# Altium PCB PCB_skinBot_tether_wire_board_v1.PcbDoc
Units mil, origin at the board's own origin, x right, y up, seen from the top; angles counter-clockwise.
Board outline 1154.89 x 1486.81 mil, 2 copper layers (Top Layer, Bottom Layer); 8 components, 10 nets, 39 pads, 25 vias.
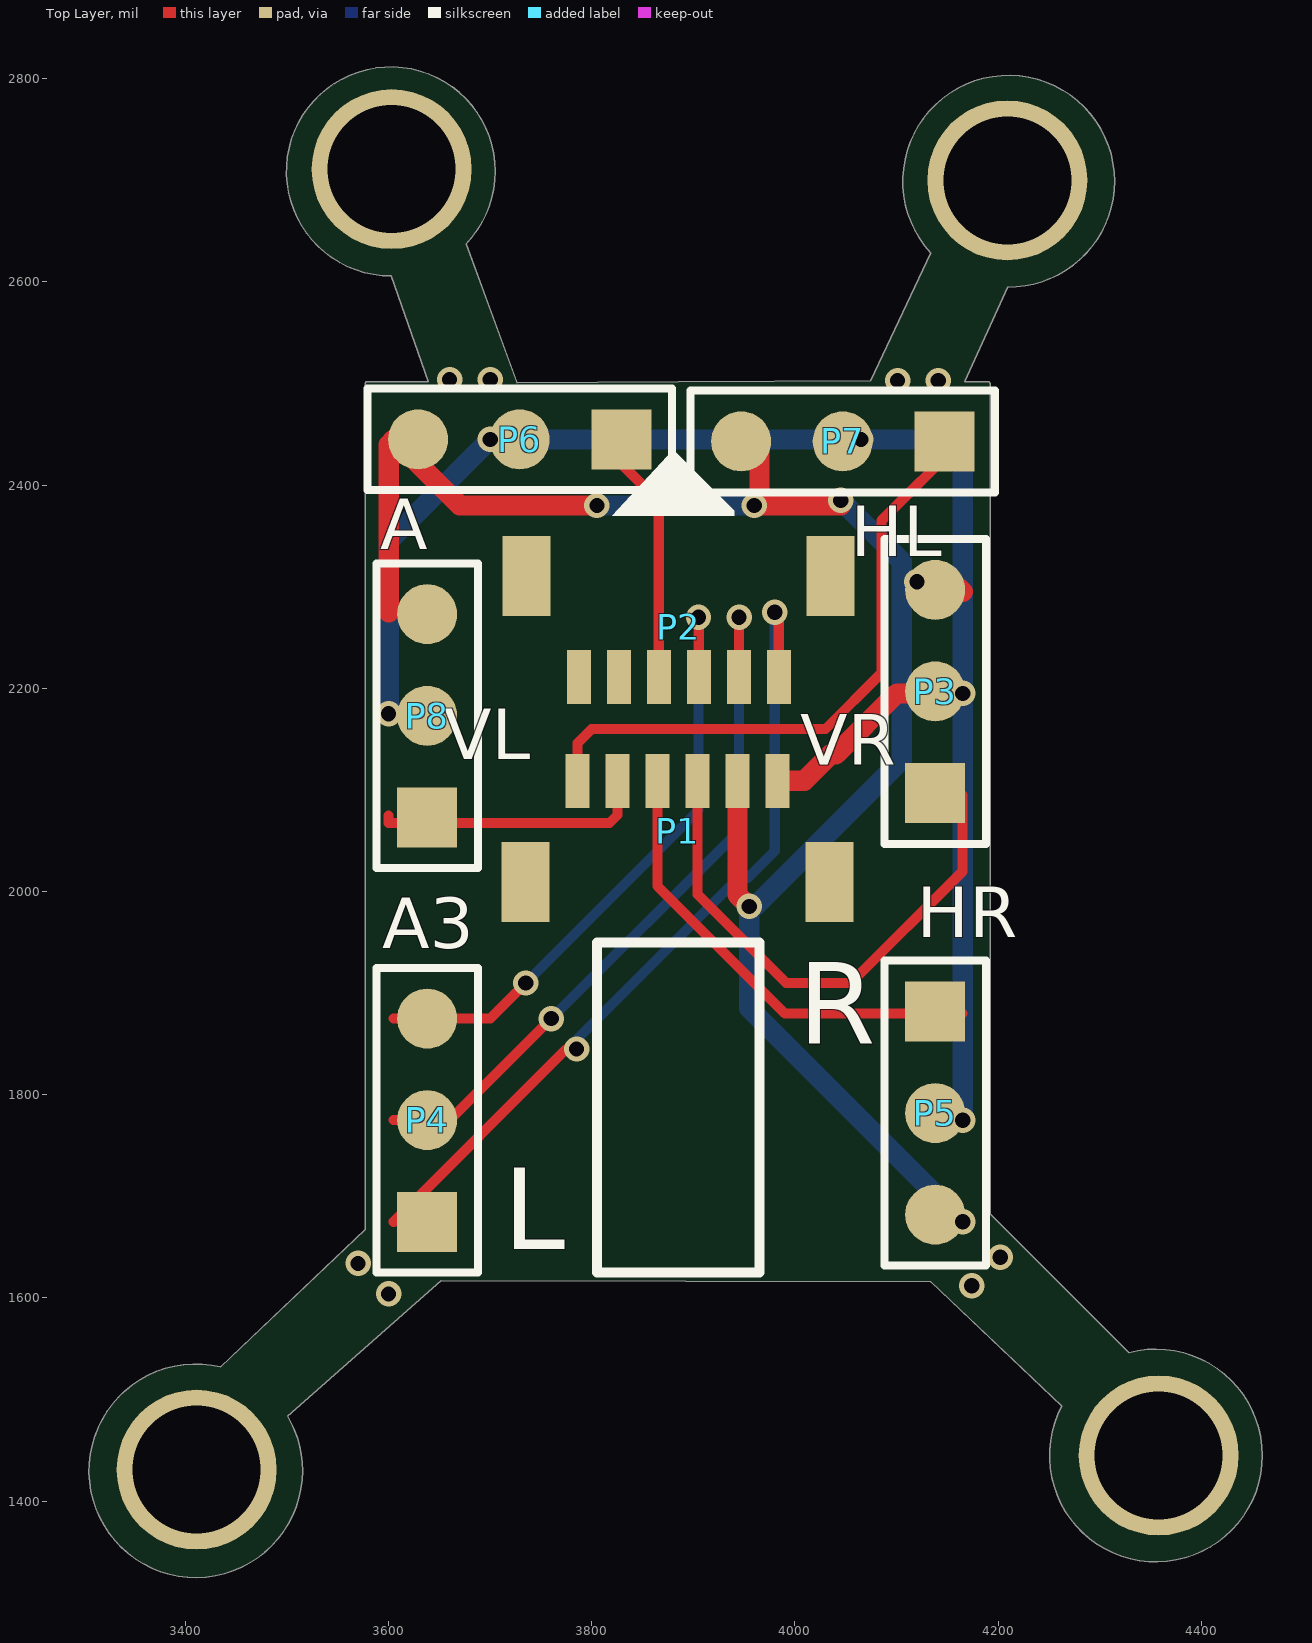
[diagram p0: Top Layer view]
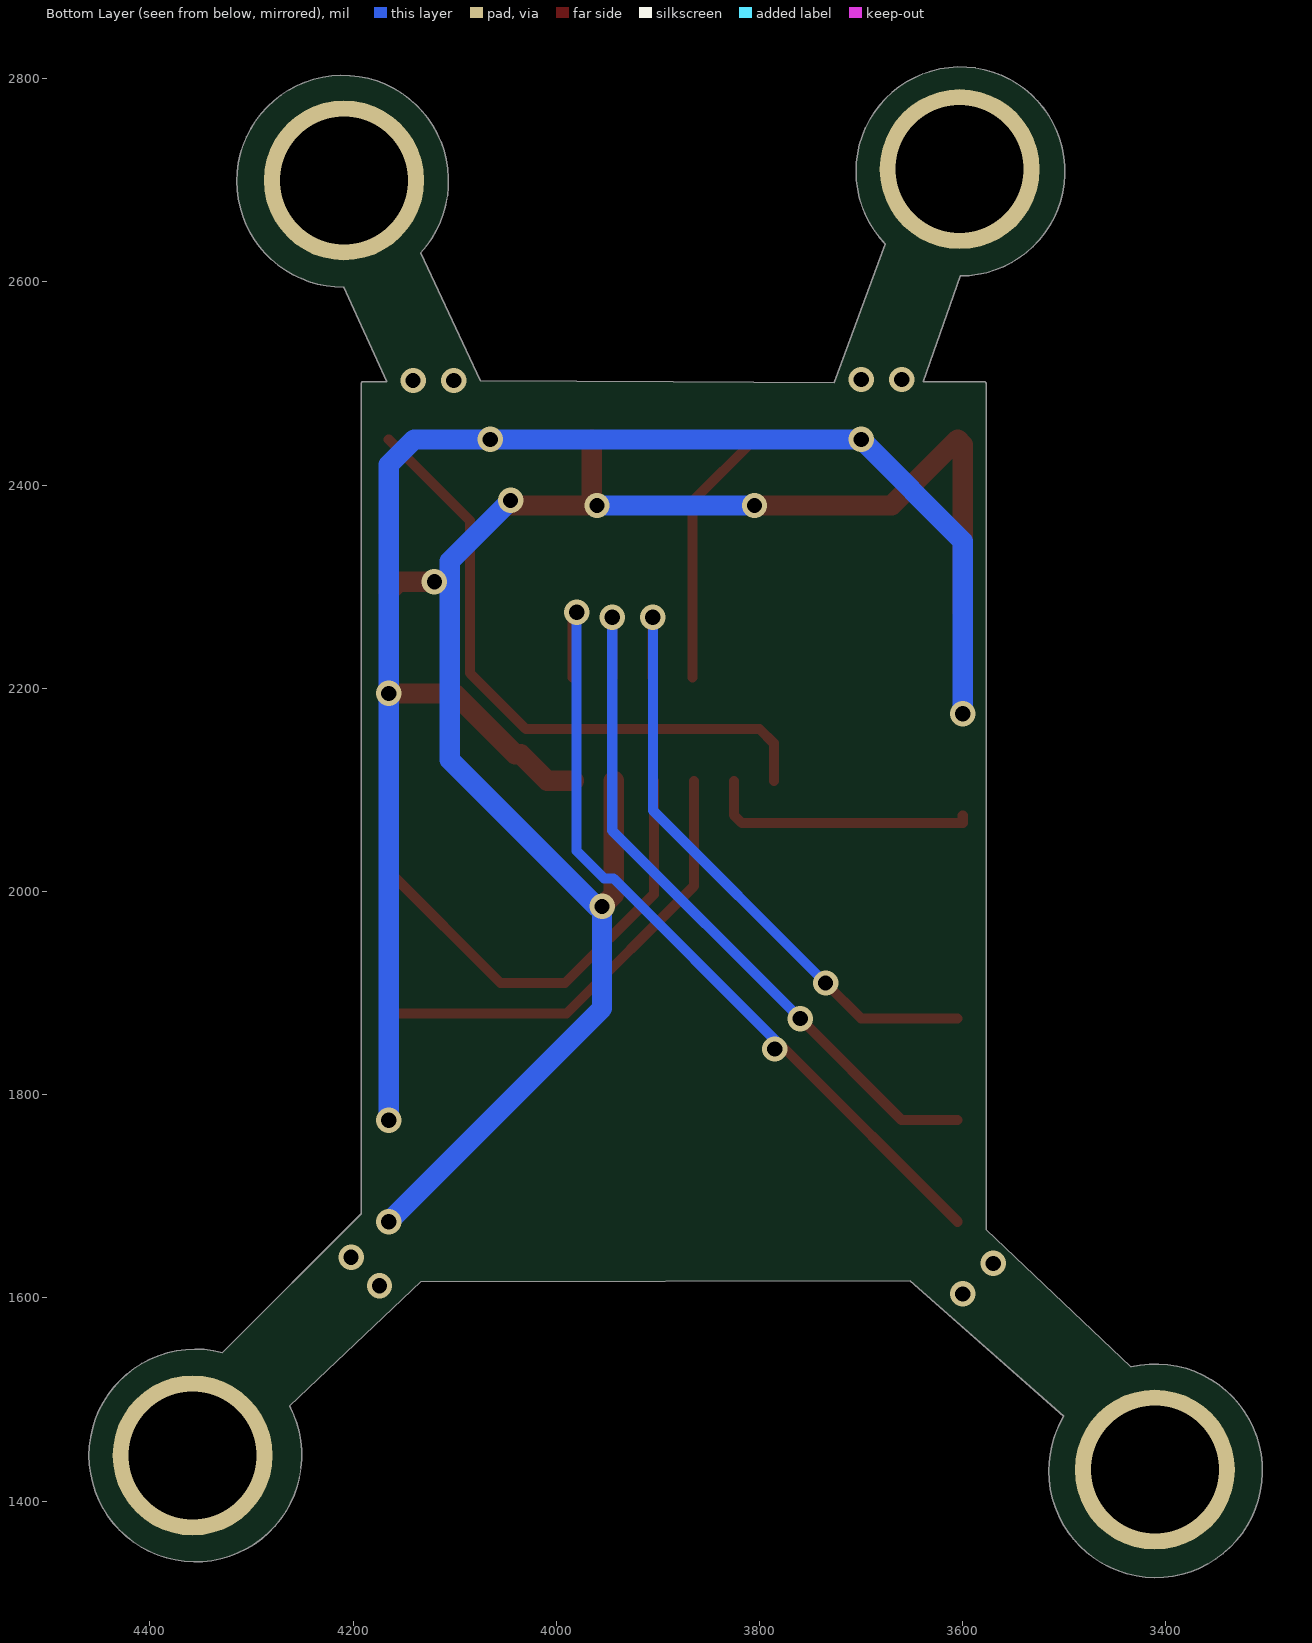
[diagram p1: Bottom Layer view, seen from below]

## Layer stack, top to bottom
Top Solder: solder mask 0.4, Solder Resist, Dk 3.5
Top Layer: signal copper 1.4
Dielectric 1: dielectric 12.6, FR-4, Dk 4.8
Bottom Layer: signal copper 1.4
Bottom Solder: solder mask 0.4, Solder Resist, Dk 3.5

## Board outline
3515.31,1429.9 ccw(c3410.2,1429.9) 3500.56,1483.61 3651.75,1616.86 4133.34,1616.15 4262.54,1493.6 ccw(c4355.27,1444.95) 4459.99,1444.95 ccw(c4355.27,1444.95) 4328.59,1546.21 4191.98,1682.82 4191.98,2500 ccw(c4190,2500) 4190,2501.98 4167.08,2501.98 4209.27,2595 ccw(c4210.32,2699.21) 4314.53,2699.21 ccw(c4210.32,2699.21) 4133.63,2628.63 4074.74,2502.98 3884.99,2501.98 ccw(c3885,2500) 3884.99,2501.98 3726.38,2500.99 3676.29,2637.51 ccw(c3602.21,2708.84) 3705.05,2708.84 ccw(c3602.21,2708.84) 3602.6,2606 3638.9,2501.98 3579,2501.98 ccw(c3579,2500) 3577.02,2500 3577.02,1667.34 3434.42,1532.18 ccw(c3410.2,1429.9)

## Design rules (kind name [scope] priority, off if disabled: settings)
Clearance [All] p1: gap=10 ignorepadtopadclearanceinfootprint=FALSE except(0: Arc-Hole Track-Hole SMDPad-Hole THPad-Hole Via-Hole Fill-Hole Poly-Hole Region-Hole Text-Hole)
PolygonConnect [All] p1: connectstyle=Relief reliefconductorwidth=10 reliefentries=4 polygonreliefangle="90 Angle" airgapwidth=10
RoutingVias [All] p1: holewidth=15 width=25 viastyle="Through Hole" minholewidth=15 minwidth=25 maxholewidth=28 maxwidth=50
SolderMaskExpansion [All] p1: expansion=4
Width [All] p1: maxlimit=30 minlimit=5 preferedwidth=10
30 further rules are at their usual default settings.

## Components (designator, comment, footprint, x,y, rotation, side; value= is the part's Value field where it differs from the comment)
P1 "JST SH 6" "JST SH 6 TOP ENTRY 1MM" 3900,2075 r0 top
P2 "JST SH 6" "JST SH 6 TOP ENTRY 1MM" 3870,2245 r180 top
P3 "Header 3" HDR1X3 4138,2097 r90 top
P4 "Header 3" HDR1X3 3638,1675 r90 top
P5 "Header 3" HDR1X3 4138,1882 r270 top
P6 "Header 3" HDR1X3 3829,2445 r180 top
P7 "Header 3" HDR1X3 4147,2443 r180 top
P8 "Header 3" HDR1X3 3638,2073 r90 top

## Footprints (in the part's own frame and the unit in brackets; to place one, negate y for a bottom-side part, rotate by r counter-clockwise, add the part's x,y. Pads: shape width x height; smd on the part's side, far side on the other; paste and mask are expansions set on the pad)
HDR1X3 [mm] "Connector; Header; 3 Position"
  rect 1.5x1.5 smd: 1(0,0)
  round 1.5 smd: 2(2.54,0) 3(5.08,0)
  silkscreen extent -1.27,-1.27 6.35,1.27
"JST SH 6 TOP ENTRY 1MM" [mm] "1 mm pitch"
  rect 0.6x1.35 smd: 1(-2.898,0.863) 2(-1.898,0.863) 3(-0.898,0.863) 4(0.102,0.863) 5(1.102,0.863) 6(2.102,0.863)
  rect 1.2x2 smd: NC(-4.195,-1.663) NC(3.405,-1.663)
  body extent -4.41,-2.53 3.59,1.07, height 4.25

## Part data
P1 P2: sparkfun part number=PRT-10210
P3 P4 P5 P6 P7 P8: "Header, 3-Pin", LatestRevisionDate=17-Jul-2002, LatestRevisionNote="Re-released for DXP Platform.", Publisher="Altium Limited"

## Free pads (board coordinates)
  rect 78.74x196.85 on Mech16 rot 155: 15(4166,2614)
  round 157.48 hole 125.98: 16(3411,1431) 16(3603,2711) 16(4209,2700) 16(4358,1445)

## Via types
v1: diameter 25, hole 15, Top Layer to Bottom Layer, tented both sides, 25 vias

## Nets (pads, with @x,y where several pads share a name; then routed paths per layer and width w, separated by ;. In a path a pad name is that pad's centre, name@x,y a point inside that pad or via, vN(x,y) a via of type N, cw(c..) or ccw(c..) an arc to the next point about the centre after c; other vN are vias at no path point)
AUX1: P2.4 P6.1 | length 259.3
  Top Layer w10: P6.1@3805,2445 3865.97,2384.03 P2.4
AUX2: P2.1 P4.1 | length 832.3
  Top Layer w10: 3605,1675 3775,1845 v1(3785,1845) ; v1(3980,2275) 3984.08,2270.92 P2.1
  Bottom Layer w10: v1(3785,1845) 3785,1854.25 3943.61,2012.86 3952.86,2012.86 3980,2040 v1(3980,2275)
AUX3: P2.2 P4.2 | length 727.2
  Top Layer w10: 3605,1775 3660,1775 v1(3760,1875) ; P2.2 3945,2211.29 v1(3945,2270)
  Bottom Layer w10: v1(3760,1875) 3945,2060 v1(3945,2270)
AUX4: P2.3 P4.3 | length 634.1
  Top Layer w10: 3605,1875 3700,1875 v1(3735,1910) ; v1(3905,2270) 3905.34,2269.66 P2.3
  Bottom Layer w10: v1(3735,1910) 3905,2080 v1(3905,2270)
GND: P1.5 P3.3 P5.3 P6.3 P7.3 P8.3 | length 1783
  Top Layer w10: 3600,2275 3605,2280
  Top Layer w20: 3600,2275 3600,2440 3605,2445 3670,2380 v1(3805,2380) ; P1.5 3943.4,1996.96 v1(3955,1985.36) ; P7.3@3965,2445 3965,2385 v1(3960,2380) 4045,2380 v1(4045,2385) ; v1(4120,2305) 4155,2305 P3.3@4165,2295
  Bottom Layer w20: v1(3805,2380) v1(3960,2380) ; v1(4045,2385) 4105,2325 4105,2129.64 3960.71,1985.36 v1(3955,1985.36) 3955,1885 v1(4165,1675)
H_L: P1.1 P7.1 | length 627.8
  Top Layer w10: P1.1 3785.92,2145.92 3800,2160 4030,2160 4085,2215 4085,2365 P7.1@4165,2445
H_R: P1.3 P5.1 | length 455.9
  Top Layer w10: P1.3 3864.66,2005.34 3990,1880 P5.1@4165,1880
V_L: P1.2 P8.1 | length 269.8
  Top Layer w10: 3600,2075 3600,2067.42 3817.42,2067.42 3825.29,2075.29 P1.2
V_R: P1.4 P3.1 | length 529.3
  Top Layer w10: P1.4 3904.03,1997.44 3991.46,1910 4055,1910 4165,2020 P3.1@4165,2095
VCC: P1.6 P3.2 P5.2 P6.2 P7.2 P8.2 | length 1649.6
  Top Layer w20: P1.6 4008.99,2108.99 4035,2135 4040.36,2135 4100.36,2195 v1(4165,2195)
  Bottom Layer w20: v1(3600,2175) 3600,2345 v1(3700,2445) v1(4065,2445) 4140,2445 4165,2420 v1(4165,2195) v1(4165,1775)
pads on no net: P1.NC P2.5 P2.6 P2.NC
copper on no net:
  other v1: 3600,1604 4174,1612 3570,1634 4202,1640 4101,2503 4141,2503 3660,2504 3700,2504

## Silkscreen, mask and mechanical layers (free items; w line width, h text height)
Top Overlay:
  region: 3820,2370 3940,2370 3940,2375 3880,2435
  lines w10: 3805,1625 3965,1625 3965,1950 3805,1950 3805,1625
  text "A" at 3592,2337 h50
  text "HL" at 4055,2330 h50
  text "VL" at 3655,2130 h50
  text "VR" at 4005,2125 h50
  text "HR" at 4120,1955 h50
  text "A3" at 3594,1944 h50
  text "R" at 4003,1850 h80
  text "L" at 3713,1648 h80
Mechanical 2:
  circle w3.94: c3605,2710 r67.08
  lines w3.94: 3641,2500 3579,2500 3579,1666.49 3435,1530 ccw(c3410.2,1429.9) 3498,1484 3651,1618.85 4134.13,1618.14 4265,1494 ccw(c4355.27,1444.95) 4328,1544 4190,1682 4190,2500 4164,2500 4208,2597 ccw(c4210.32,2699.21) 4136,2629 4076,2501 3885,2500 3725,2499 3674,2638 ccw(c3602.21,2708.84) 3604,2608 3641,2502
Mechanical 16:
  circle w10: c3875,2065 r561.47
  circle w10: c3875,2065 r789
  circle w3.94: c4210,2700 r67.08
  circle w3.94: c4356.12,1445 r67.08
  circle w3.94: c3409.98,1431.35 r67.08
  circle w3.94: c4210,2700 r103.08
  circle w3.94: c4356.12,1445 r103.08
  circle w3.94: c3409.98,1431.35 r103.08
  circle w3.94: c3606.12,2710 r103.08
  lines w10: 3405,2700 3875,2065 ; 3409.98,1431.35 3875,2065 ; 4355,2680 3875,2065 ; 4360,1440 3875,2065